# Altium PCB 电路板.PcbDoc
Units mm, origin at the board's own origin, x right, y up, seen from the top; angles counter-clockwise.
Board outline 20 x 22.84 mm, 2 copper layers (Top Layer, Bottom Layer); 4 components, 0 nets, 16 pads, 4 vias.
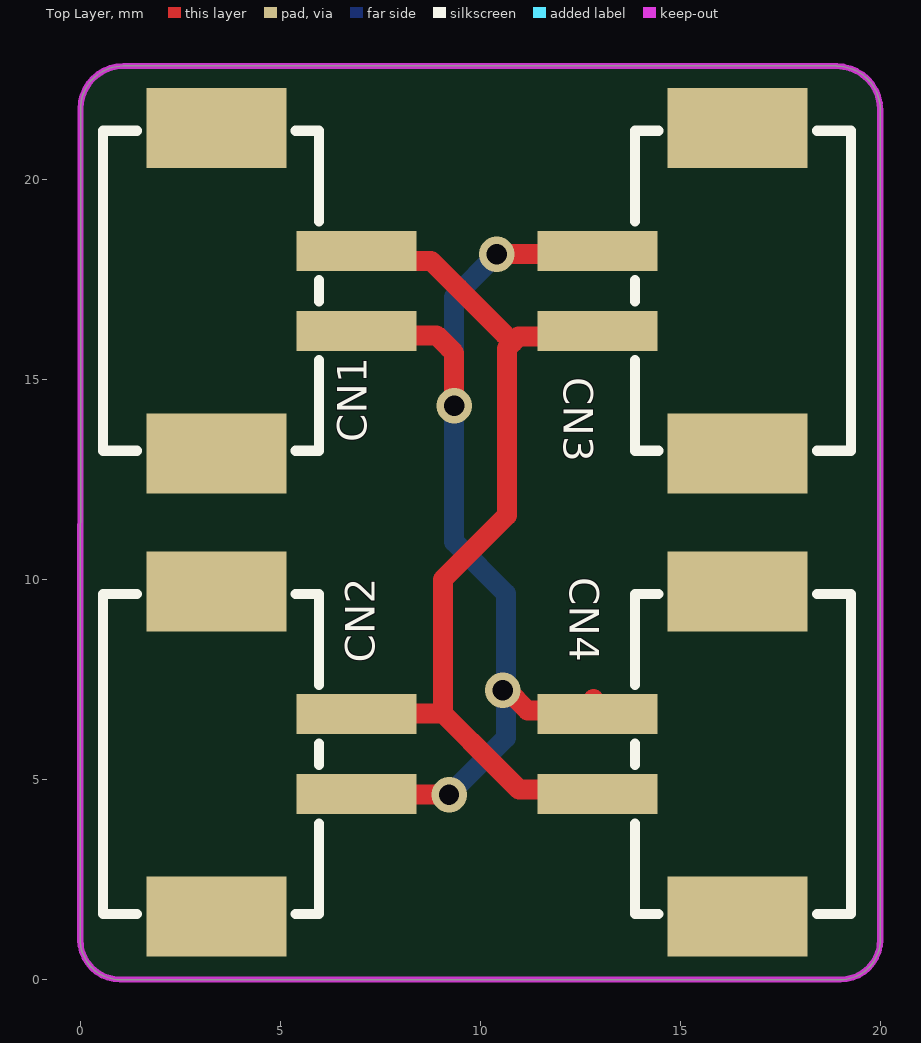
[diagram p0: Top Layer view]
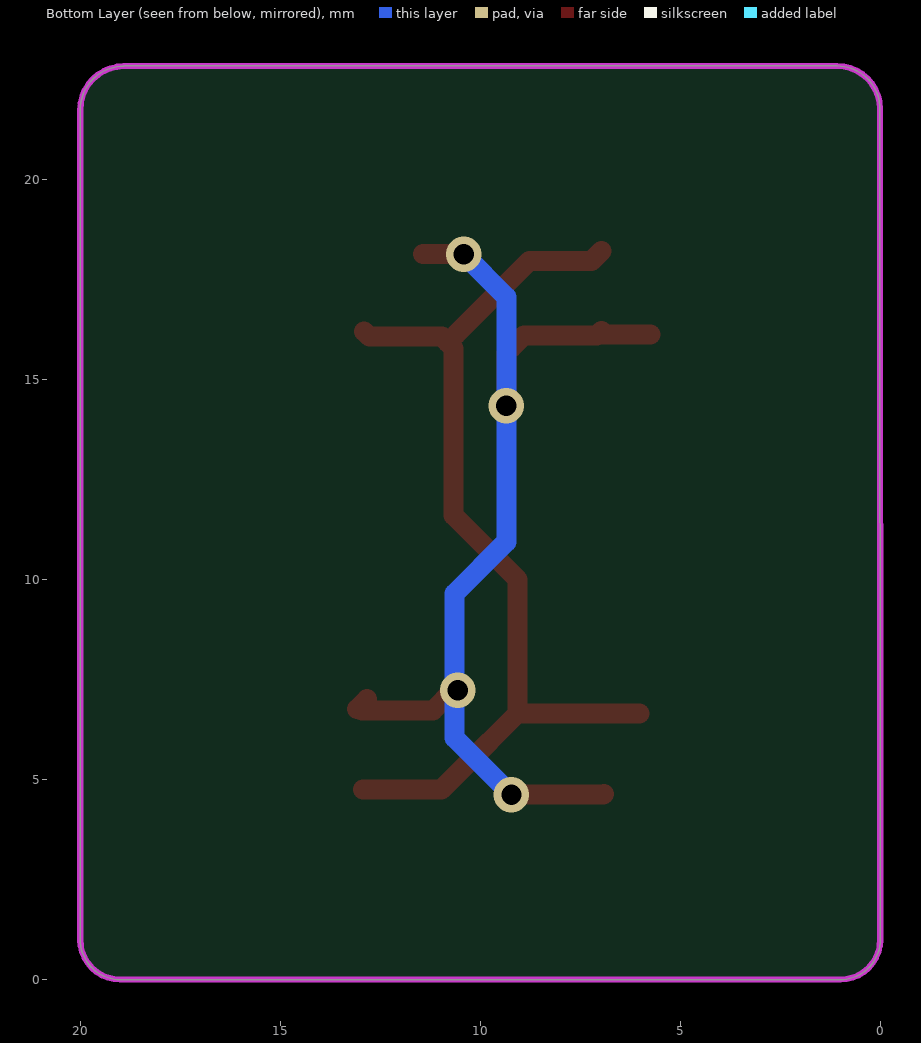
[diagram p1: Bottom Layer view, seen from below]

## Layer stack, top to bottom
Top Solder: solder mask 0.0102, Solder Resist, Dk 3.5
Top Layer: signal copper 0.0356
Dielectric 1: dielectric 0.32, FR-4, Dk 4.8
Bottom Layer: signal copper 0.0356
Bottom Solder: solder mask 0.0102, Solder Resist, Dk 3.5

## Board outline
1,0 cw(c1,1) 0,1 0.009,21.819 0.008,21.772 cw(c1.077,21.772) 1.077,22.842 18.912,22.842 18.912,22.836 cw(c18.912,21.748) 20,21.748 20,1 cw(c19,1) 19,0

## Design rules (kind name [scope] priority, off if disabled: settings)
Clearance [All] p1: gap=0.254 ignorepadtopadclearanceinfootprint=FALSE except(0: Arc-Hole Track-Hole SMDPad-Hole THPad-Hole Via-Hole Fill-Hole Poly-Hole Region-Hole Text-Hole)
PolygonConnect [All] p1: connectstyle=Relief reliefconductorwidth=0.254 reliefentries=4 polygonreliefangle="90 Angle" airgapwidth=0.254
RoutingVias [All] p1: holewidth=0.711 width=1.27 viastyle="Through Hole" minholewidth=0.711 minwidth=1.27 maxholewidth=0.711 maxwidth=1.27
SolderMaskExpansion [All] p1: expansion=0.102 istentingtop=FALSE
Width [All] p1: maxlimit=3 minlimit=0.1 preferedwidth=0.5 minimp=50.000000 maximp=50.000000 favimp=50.000000
30 further rules are at their usual default settings.

## Components (designator, comment, footprint, x,y, rotation, side; value= is the part's Value field where it differs from the comment)
CN1 "A2001LF-02A" CONN-SMD_PH2.0-1X2PW 5.156,17.221 r90 top
CN2 "A2001LF-02A" CONN-SMD_PH2.0-1X2PW 5.156,5.639 r90 top (schematic designator CN1)
CN3 "A2001LF-02A" CONN-SMD_PH2.0-1X2PW 14.681,17.221 r270 top (schematic designator CN1)
CN4 "A2001LF-02A" CONN-SMD_PH2.0-1X2PW 14.681,5.639 r270 top (schematic designator CN1)

## Footprints (in the part's own frame and the unit in brackets; to place one, negate y for a bottom-side part, rotate by r counter-clockwise, add the part's x,y. Pads: shape width x height; smd on the part's side, far side on the other; paste and mask are expansions set on the pad)
CONN-SMD_PH2.0-1X2PW [mm]
  rect 1x3 smd: 1(-1,-1.756) 2(1,-1.756)
  rect 2x3.5 smd: 3(4.064,1.756) 4(-4.064,1.756)
  silkscreen extent -4,-0.82 4,4.58

## Via types
v1: diameter 0.889, hole 0.508, Top Layer to Bottom Layer, tented both sides, 4 vias

## Nets (pads, with @x,y where several pads share a name; then routed paths per layer and width w, separated by ;. In a path a pad name is that pad's centre, name@x,y a point inside that pad or via, vN(x,y) a via of type N, cw(c..) or ccw(c..) an arc to the next point about the centre after c; other vN are vias at no path point)
pads on no net: CN1.1 CN1.2 CN1.3 CN1.4 CN2.1 CN2.2 CN2.3 CN2.4 CN3.1 CN3.2 CN3.3 CN3.4 CN4.1 CN4.2 CN4.3 CN4.4
copper on no net: | length 51.3
  Top Layer w0.254: 10.607,16.135 10.814,15.928
  Top Layer w0.5: 5.74,16.129 6.966,16.129 ; 6.02,6.655 9.068,6.655 ; 6.912,4.639 6.92,4.631 9.212,4.631 v1(9.22,4.623) ; 6.966,16.221 7.08,16.107 8.912,16.107 9.223,15.796 9.347,15.672 v1(9.347,14.351) ; 6.966,18.221 7.216,17.971 8.771,17.971 9.45,17.292 10.607,16.135 ; v1(10.414,18.136) 11.43,18.136 ; v1(10.566,7.239) 10.672,7.239 11.18,6.731 12.953,6.731 ; 12.828,7.016 13.078,6.766 ; 12.9,16.205 12.769,16.074 10.961,16.074 10.814,15.928 10.668,15.781 10.668,15.014 10.668,11.608 9.068,10.008 9.068,6.655 ; 12.926,4.748 10.975,4.748 10.426,5.297 9.068,6.655
  Bottom Layer w0.5: v1(9.22,4.623) 10.641,6.043 10.641,7.165 v1(10.566,7.239) 10.641,7.313 10.641,9.654 9.347,10.947 v1(9.347,14.351) 9.347,17.069 v1(10.414,18.136)

## Keep-outs
Keep-Out Layer:
  lines w0.152: 0.008,21.772 cw(c1.077,21.772) 1.077,22.842 18.912,22.842 ; 0.009,21.819 0,1 ccw(c1,1) 1,0 19,0 ccw(c19,1) 20,1 20,21.748 ccw(c18.912,21.748) 18.912,22.836